# Altium PCB ElectricalConductivityMeter.PcbDoc
Units mm, origin at the board's own origin, x right, y up, seen from the top; angles counter-clockwise.
Board outline 95.04 x 76.23 mm, 2 copper layers (Top Layer, Bottom Layer); 67 components, 46 nets, 217 pads, 16 vias.
Unrouted connection lines stored in the file: 1.
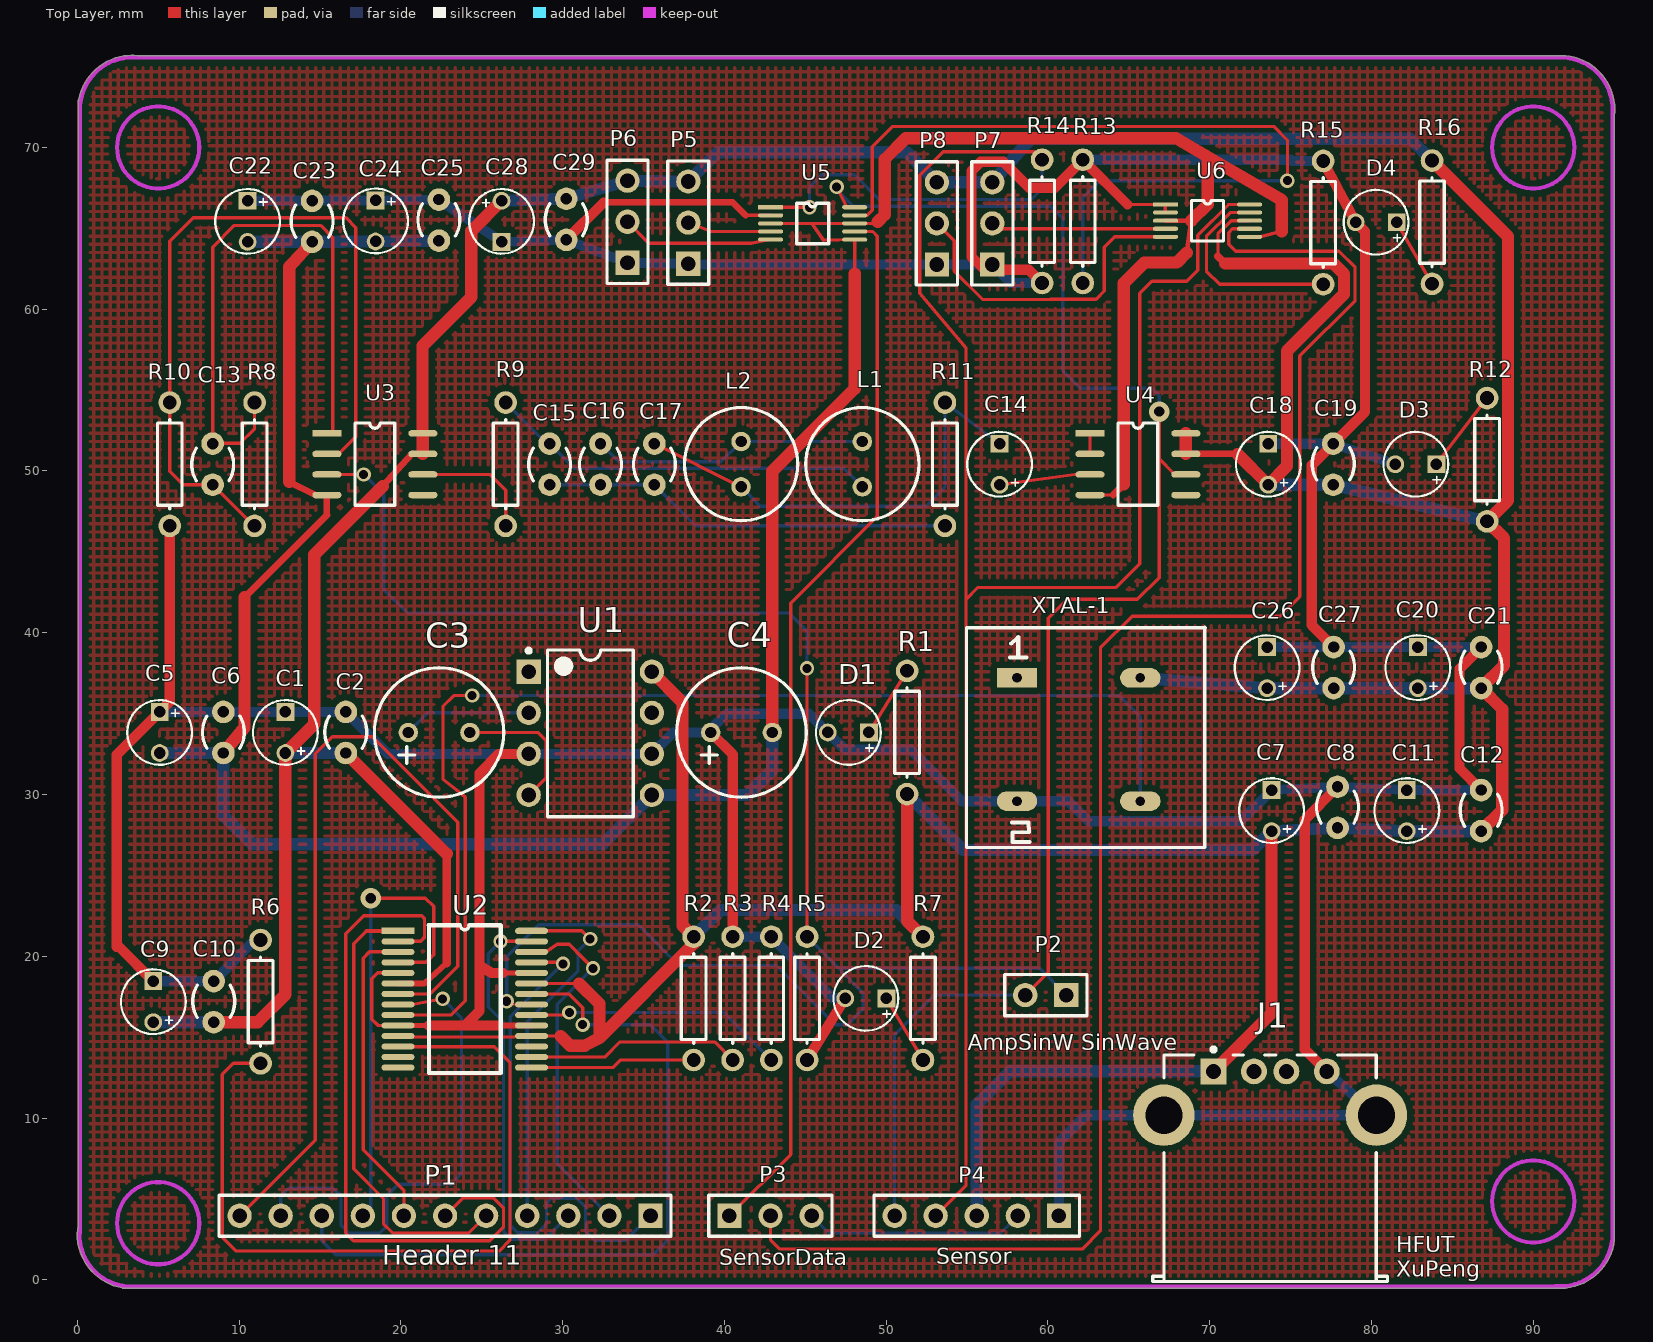
[diagram p0: Top Layer view]
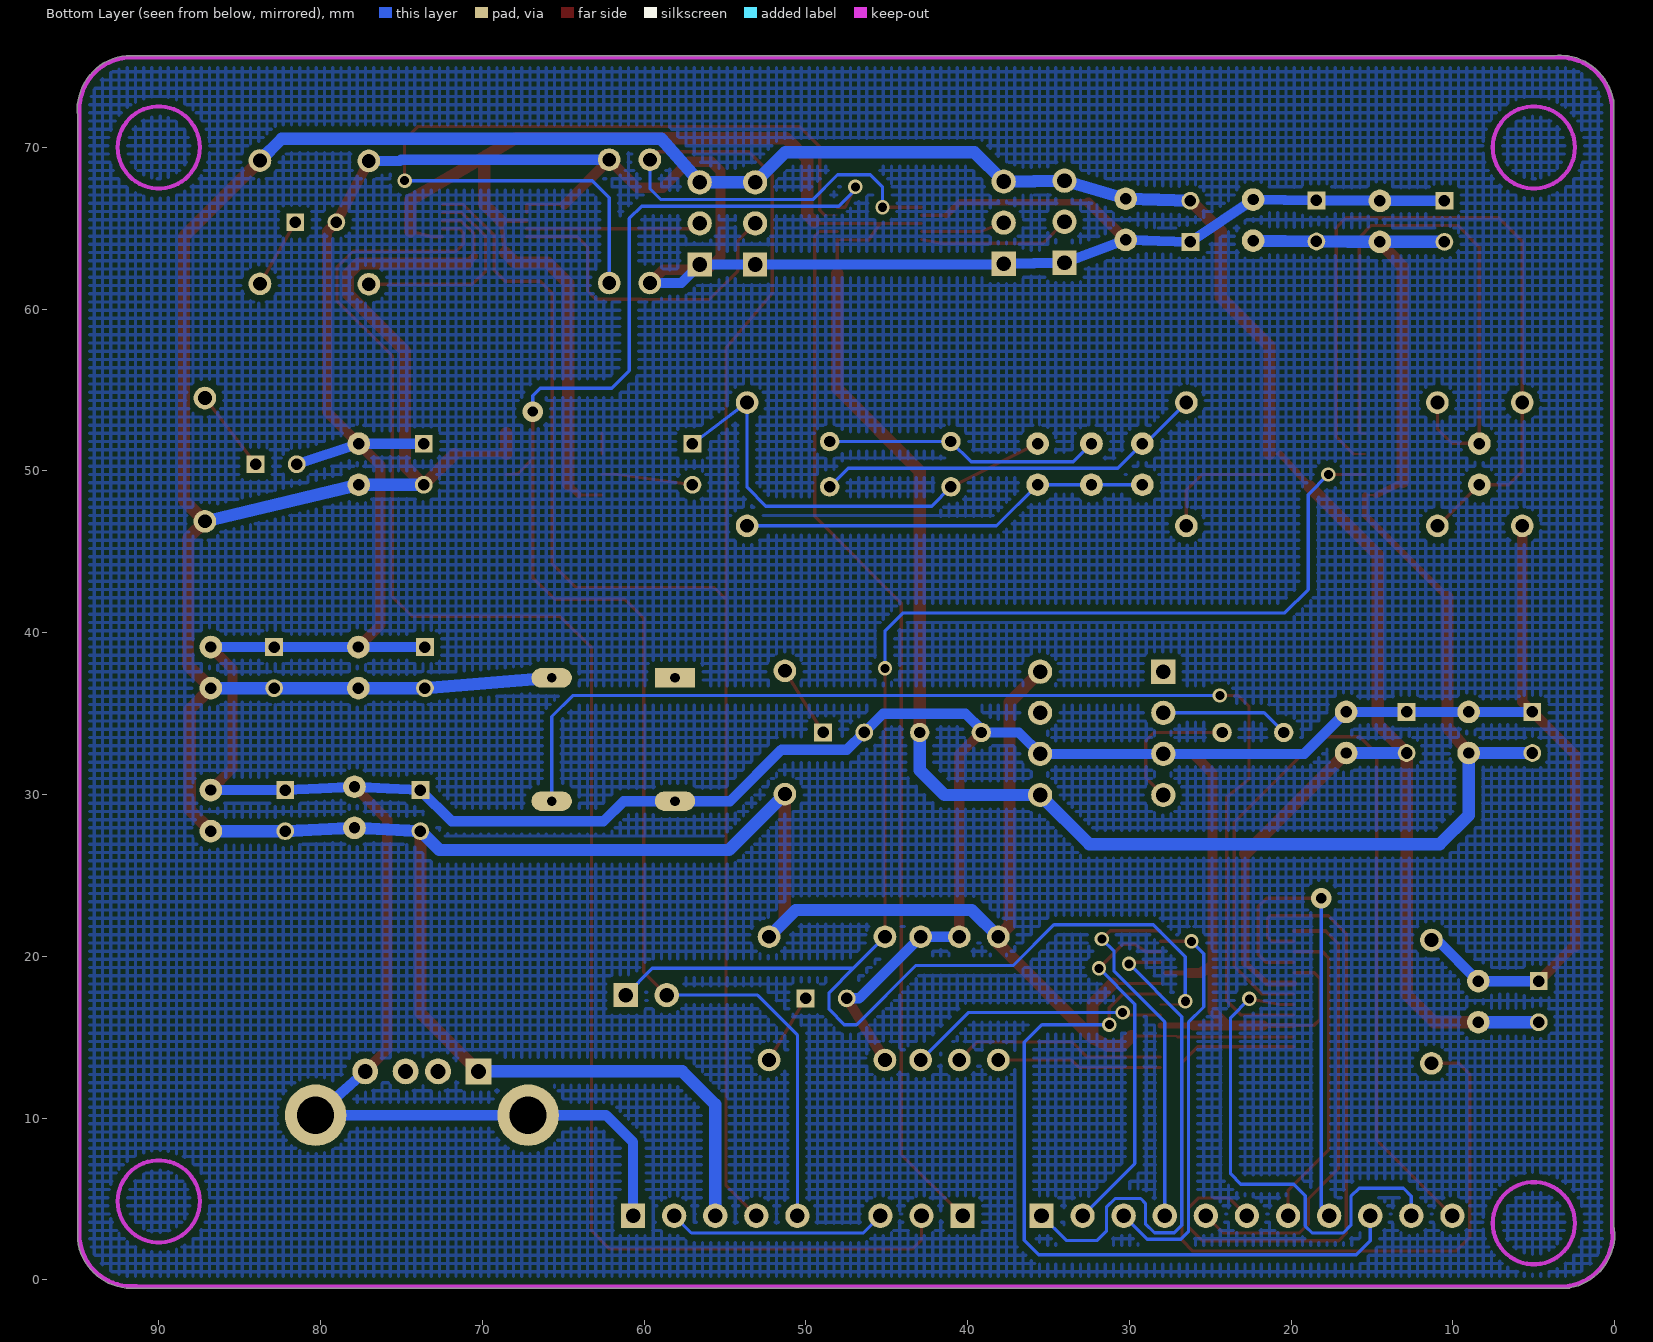
[diagram p1: Bottom Layer view, seen from below]

## Layer stack, top to bottom
Top Solder: solder mask 0.0102, Solder Resist, Dk 3.5
Top Layer: signal copper 0.0356
Dielectric1: dielectric 0.32, FR-4, Dk 4.8
Bottom Layer: signal copper 0.0356
Bottom Solder: solder mask 0.0102, Solder Resist, Dk 3.5

## Board outline
2.78,-0.497 cw(c3.367,2.819) 0.015,3.136 cw(c0.141,3.124) 0.05,3.213 0.05,72.862 cw(c0.178,72.862) 0.096,72.959 cw(c3.404,72.329) 2.897,75.658 cw(c2.972,75.555) 2.972,75.682 3.095,75.682 cw(c3.404,72.329) 3.712,75.682 91.973,75.682 cw(c91.973,75.555) 91.993,75.681 cw(c91.669,72.329) 95.036,72.329 cw(c91.669,72.329) 95.022,72.018 95.022,2.515 cw(c94.894,2.515) 95.016,2.476 cw(c91.669,2.845) 91.431,-0.514 cw(c91.364,-0.406) 91.364,-0.534 2.87,-0.534 cw(c2.87,-0.406)

## Design rules (kind name [scope] priority, off if disabled: settings)
Clearance Clearance_PolyGon [InPolygon] p1: gap=0.381 ignorepadtopadclearanceinfootprint=TRUE
Clearance [All] p2: gap=0.203 ignorepadtopadclearanceinfootprint=TRUE
FabricationTestpoint [(IsPad And (OnTopLayer Or OnBottomLayer))] p1: side=3 testpointundercomponent=TRUE minsize=1.016 maxsize=2.54 preferedsize=1.524 minholesize=0 maxholesize=1.016 preferedholesize=0.813 testpointgrid=0.025 allowsidetop=TRUE allowsidebottom=TRUE usegrid=TRUE gridtolerance=0
HoleSize [All] p1: absolutevalues=TRUE maxlimit=3.048 minlimit=0.025 maxpercent=80.000 minpercent=20.000
MinimumAnnularRing [All] p1: minimumring=0.254
PolygonConnect [All] p1: connectstyle=Relief reliefconductorwidth=0.254 reliefentries=4 polygonreliefangle="90 Angle" airgapwidth=0.254
RoutingPriority RoutingPriority_-5V [InNet('-5V')] p1: routingpriority=20
RoutingPriority RoutingPriority_GND [InNet('GND')] p2: routingpriority=30
RoutingPriority RoutingPriority_+5V [InNet('+5V')] p3: routingpriority=20
RoutingVias [All] p1: holewidth=0.559 width=0.889 viastyle="Through Hole" minholewidth=0.508 minwidth=0.889 maxholewidth=0.711 maxwidth=0.889
RoutingVias RoutingVias_-5V [All] p2: holewidth=0.635 width=1.27 viastyle="Through Hole" minholewidth=0.508 minwidth=1.016 maxholewidth=0.711 maxwidth=1.27
RoutingVias RoutingVias_+5V [InNet('+5V')] p3: holewidth=0.635 width=1.016 viastyle="Through Hole" minholewidth=0.508 minwidth=1.016 maxholewidth=0.711 maxwidth=1.27
SMDNeckDown [All] p1: percent=30.000
SolderMaskExpansion [All] p1: expansion=0.102
Width Width_-5V [InNet('-5V')] p1: maxlimit=1.016 minlimit=0.203 preferedwidth=0.762
Width Width_+5V [InNet('+5V')] p2: maxlimit=1.016 minlimit=0.203 preferedwidth=0.762
Width Width_GND [InNet('GND')] p3: maxlimit=0.762 minlimit=0.203 preferedwidth=0.635
Width [All] p4: maxlimit=0.254 minlimit=0.203 preferedwidth=0.203
27 further rules are at their usual default settings.

## Classes and differential pairs
component class Sensor: C22 C23 C24 C25 C26 C27 C28 C29 D4 P3 P4 P5 P6 P7 P8 R13 R14 R15 R16 U5 U6
component class SinWaveAmplifier: C13 C14 C15 C16 C17 C18 C19 C20 C21 D3 L1 L2 R8 R9 R10 R11 R12 U3 U4
component class SinWaveCreator: C7 C8 C9 C10 C11 C12 D2 P1 P2 R2 R3 R4 R5 R6 R7 U2 XTAL-1
component class Power: C1 C2 C3 C4 C5 C6 D1 J1 R1 U1

## Components (designator, comment, footprint, x,y, rotation, side; value= is the part's Value field where it differs from the comment)
C1 "Cap" RB0.1/0.2 12.865,35.107 r90 top value=10uF
C2 "Cap" C-RAD 16.599,33.837 r270 top value=0.1uF
C3 "Cap Pol" RB0.15/3 20.46,33.837 r0 top value=150uF
C4 "Cap Pol" RB0.15/3 39.154,33.837 r0 top value=150uF
C5 "Cap" Rev-RB0.1/0.2 5.093,35.107 r90 top value=10uF
C6 "Cap" C-RAD 9.03,33.837 r270 top value=0.1uF
C7 "Cap" RB0.1/0.2 73.825,30.277 r90 top value=10uF
C8 "Cap" C-RAD 77.902,29.21 r270 top value=0.1uF
C9 "Cap" RB0.1/0.2 4.699,18.466 r90 top value=10uF
C10 "Cap" C-RAD 8.433,17.196 r270 top value=0.1uF
C11 "Cap" RB0.1/0.2 82.182,30.277 r90 top value=10uF
C12 "Cap" C-RAD 86.779,29.007 r270 top value=0.1uF
C13 "Cap" C-RAD 8.369,50.419 r90 top value=1pF
C14 "Cap" RB0.1/0.2 57.01,51.689 r90 top value=1uF
C15 "Cap" C-RAD 29.197,50.419 r90 top value=2.2nF
C16 "Cap" C-RAD 32.347,50.419 r90 top value=3.3nF
C17 "Cap" C-RAD 35.674,50.419 r90 top value=2.2nF
C18 "Cap" RB0.1/0.2 73.622,51.689 r90 top value=10uF
C19 "Cap" C-RAD 77.635,50.419 r270 top value=0.1uF
C20 "Cap" RB0.1/0.2 82.867,39.116 r90 top value=10uF
C21 "Cap" C-RAD 86.779,37.846 r270 top value=0.1uF
C22 "Cap" Rev-RB0.1/0.2 10.528,66.7 r90 top value=10uF
C23 "Cap" C-RAD 14.516,65.43 r270 top value=0.1uF
C24 "Cap" Rev-RB0.1/0.2 18.44,66.726 r90 top value=10uF
C25 "Cap" C-RAD 22.352,65.507 r270 top value=0.1uF
C26 "Cap" RB0.1/0.2 73.546,39.116 r90 top value=10uF
C27 "Cap" C-RAD 77.66,37.846 r270 top value=0.1uF
C28 "Cap" RB0.1/0.2 26.225,64.16 r270 top value=10uF
C29 "Cap" C-RAD 30.226,65.557 r90 top value=0.1uF
D1 "LED0" RB2.54/4 48.933,33.837 r0 top
D2 "LED0" RB2.54/4 50.013,17.399 r0 top
D3 "LED0" RB2.54/4 84.01,50.419 r0 top
D4 "LED0" RB2.54/4 81.559,65.38 r0 top
J1 "PowerIn+5V" USB_A1 73.736,-0.102 r270 top
L1 "Inductor" PK0608-2.8/7 48.527,49.019 r90 top value=6.8uH
L2 "Inductor" PK0608-2.8/7 41.034,51.819 r270 top value=6.8uH
P1 "Header 11" HDR1X11 35.433,3.962 r180 top
P2 "AmpSinW SinWave" HDR1X2 61.138,17.602 r180 top
P3 "SensorData" HDR1X3 40.31,3.962 r0 top
P4 "Sensor" HDR1X5 60.681,3.962 r180 top
P5 "Header 3" HDR1X3 37.77,62.814 r90 top
P6 "Header 3" HDR1X3 34.011,62.865 r90 top
P7 "Header 3" HDR1X3 56.566,62.763 r90 top
P8 "Header 3" HDR1X3 53.137,62.763 r90 top
R1 "Res1" AXIAL-0.3 51.295,33.837 r270 top value=150
R2 "Res1" AXIAL-0.3 38.1,17.399 r90 top value=1K
R3 "Res1" AXIAL-0.3 40.513,17.399 r90 top value=1K
R4 "Res1" AXIAL-0.3 42.901,17.399 r90 top value=100
R5 "Res1" AXIAL-0.3 45.11,17.399 r90 top value=100
R6 "Res1" AXIAL-0.3 11.328,17.196 r90 top value=3.9K
R7 "Res1" AXIAL-0.3 52.273,17.399 r90 top value=150
R8 "Res1" AXIAL-0.3 10.96,50.419 r90 top value=1K
R9 "Res1" AXIAL-0.3 26.479,50.419 r90 top value=50
R10 "Res1" AXIAL-0.3 5.715,50.419 r90 top value=1K
R11 "Res1" AXIAL-0.3 53.632,50.419 r90 top value=1K
R12 "Res1" AXIAL-0.3 87.147,50.698 r270 top value=150
R13 "Res1" AXIAL-0.3 62.154,65.43 r90 top value=1K
R14 "Res1" AXIAL-0.3 59.639,65.43 r90 top value=10K
R15 "Res1" AXIAL-0.3 77.013,65.354 r90 top value=1K
R16 "Res1" AXIAL-0.3 83.744,65.38 r90 top value=150
U1 "MAX660" DIP-8 31.712,33.782 r0 top
U2 "AD9850" SSOP28 23.952,17.348 r0 top
U3 "ADA4817" SOP8 15.43,52.324 r0 top
U4 "ADA4817" SOP8 62.598,52.324 r0 top
U5 "AD8250" MSOP10 42.857,66.303 r0 top
U6 "AD8250" MSOP10 67.266,66.473 r0 top
XTAL-1 "XTAL-125M-7.62" XTAL-0.3*4 58.09,37.211 r0 top locked

## Footprints (in the part's own frame and the unit in brackets; to place one, negate y for a bottom-side part, rotate by r counter-clockwise, add the part's x,y. Pads: shape width x height; smd on the part's side, far side on the other; paste and mask are expansions set on the pad)
AXIAL-0.3 [mm] "Axial Device, Thru-Hole; 2 Leads; 0.3 in Pin Spacing"
  round 1.4 hole 0.85: 1(-3.81,0) 2(3.81,0)
  silkscreen extent -2.77,-0.76 2.77,0.76
C-RAD [mm] "瓷片电容"
  round 1.4 hole 0.7: 1(-1.27,0) 2(1.27,0)
  silkscreen extent -1.02,-1.3 0.98,1.3
DIP-8 [mm] "DIP; 8 Leads; Row Spacing 7.62 mm; Pitch 2.54 mm"
  rect 1.5x1.5 hole 0.9: 1(-3.81,3.81)
  round 1.5 hole 0.9: 2(-3.81,1.27) 3(-3.81,-1.27) 4(-3.81,-3.81) 5(3.81,-3.81) 6(3.81,-1.27) 7(3.81,1.27) 8(3.81,3.81)
  silkscreen extent -3.93,-5.15 2.65,5.23, body extent -3.6,-5.15 3.6,5.15, height 5.08
HDR1X2 [mm] "Connector; Header; 2 Position"
  rect 1.5x1.5 hole 0.9: 1(0,0)
  round 1.5 hole 0.9: 2(2.54,0)
  silkscreen extent -1.27,-1.27 3.81,1.27
HDR1X3 [mm] "Connector; Header; 3 Position"
  rect 1.5x1.5 hole 0.9: 1(0,0)
  round 1.5 hole 0.9: 2(2.54,0) 3(5.08,0)
  silkscreen extent -1.27,-1.27 6.35,1.27
HDR1X5 [mm] "Connector; Header; 5 Position"
  rect 1.5x1.5 hole 0.9: 1(0,0)
  round 1.5 hole 0.9: 2(2.54,0) 3(5.08,0) 4(7.62,0) 5(10.16,0)
  silkscreen extent -1.27,-1.27 11.43,1.27
HDR1X11 [mm] "Connector; Header; 11 Position"
  rect 1.5x1.5 hole 0.9: 1(0,0)
  round 1.5 hole 0.9: 2(2.54,0) 3(5.08,0) 4(7.62,0) 5(10.16,0) 6(12.7,0) 7(15.24,0) 8(17.78,0) 9(20.32,0) 10(22.86,0) 11(25.4,0)
  silkscreen extent -1.27,-1.27 26.67,1.27
MSOP10 [mm] "脚距0.5mm"
  rect 1.55x0.25 smd: 1(0,0)
  oval 1.55x0.25 smd: 2(0,-0.5) 3(0,-1) 4(0,-1.5) 5(0,-2) 6(5.2,-2) 7(5.2,-1.5) 8(5.2,-1) 9(5.2,-0.5) 10(5.2,0)
  silkscreen extent 1.61,-2.25 3.59,0.25
PK0608-2.8/7 [mm]
  round 1.2 hole 0.7: 1(0,0) 2(2.8,0)
  silkscreen extent -2.1,-3.5 4.9,3.5
RB0.1/0.2 [mm]
  rect 1.1x1.1 hole 0.711: 1(0,0)
  round 1.1 hole 0.711: 2(-2.54,0)
  silkscreen extent -3.27,-2 0.73,2
RB0.15/3 [mm]
  round 1.2 hole 0.7: 1(0,0) 2(3.81,0)
  silkscreen extent -2.09,-4 5.9,4
RB2.54/4 [mm]
  rect 1.1x1.1 hole 0.711: 1(0,0)
  round 1.1 hole 0.711: 2(-2.54,0)
  silkscreen extent -3.27,-2 0.73,2
Rev-RB0.1/0.2 [mm] "正负极颠倒的RB0.1/0.2"
  rect 1.1x1.1 hole 0.711: 1(0,0)
  round 1.1 hole 0.711: 2(-2.54,0)
  silkscreen extent -3.27,-2 0.73,2
SOP8 [mm] "脚距1.27mm"
  rect 1.8x0.4 smd: 1(0,0)
  oval 1.8x0.4 smd: 2(0,-1.27) 3(0,-2.54) 4(0,-3.81) 5(5.93,-3.81) 6(5.93,-2.54) 7(5.93,-1.27) 8(5.93,0)
  silkscreen extent 1.73,-4.44 4.2,0.64
SSOP28 [mil] "脚距0.65mm"
  rect 80x15 smd: 1(-162.5,166.4)
  oval 80x15 smd: 2(-162.5,140.8) 3(-162.5,115.2) 4(-162.5,89.6) 5(-162.5,64) 6(-162.5,38.4) 7(-162.5,12.8) 8(-162.5,-12.8) 9(-162.5,-38.4) 10(-162.5,-64) 11(-162.5,-89.6) 12(-162.5,-115.2) 13(-162.5,-140.8) 14(-162.5,-166.4) 15(162.5,-166.4) 16(162.5,-140.8) 17(162.5,-115.2) 18(162.5,-89.6) 19(162.5,-64) 20(162.5,-38.4) 21(162.5,-12.8) 22(162.5,12.8) 23(162.5,38.4) 24(162.5,64) 25(162.5,89.6) 26(162.5,115.2) 27(162.5,140.8) 28(162.5,166.4)
  silkscreen extent -88,-179 88,180
USB_A1 [mm]
  rect 1.6x1.6 hole 0.92: 1(-12.99,-3.5)
  round 1.6 hole 0.92: 2(-12.99,-1) 3(-12.99,1) 4(-12.99,3.5)
  round 3.8 hole 2.3: 5(-10.28,6.57) 6(-10.28,-6.57)
  silkscreen extent -14.46,-7.25 0,7.25
XTAL-0.3*4 [mm] "125Mhz有源晶振，正方形四脚"
  rect 2.5x1.2 hole 0.6: 1(0,0)
  oval 2.5x1.2 hole 0.6: 2(0,-7.62) 3(7.62,-7.62) 4(7.62,0)
  silkscreen extent -3.12,-10.49 11.66,3.15

## Part data
C1 C2 C5 C6 C7 C8 C9 C10 C11 C12 C13 C14 C15 C16 C17 C18 C19 C20 C21 C22 C23 C24 C25 C26 C27 C28 C29: "无极性电容", LatestRevisionDate=17-Jul-2002, LatestRevisionNote="Re-released for DXP Platform.", PackageReference=RAD-0.3, Published=8-Jun-2000, Publisher="Altium Limited"
C3 C4: "极性电解电容", LatestRevisionDate=17-Jul-2002, LatestRevisionNote="Re-released for DXP Platform.", PackageReference=RB7.6-15, Published=8-Jun-2000, Publisher="Altium Limited", Vol=16V
D1 D2 D3 D4: "Typical INFRARED GaAs LED", LatestRevisionDate=08-Jul-2005, LatestRevisionNote="Mech Layer 1 removed.", PackageDescription="LED; 2 Leads", PackageReference=LED-0, Published=8-Jun-2000, Publisher="Altium Limited"
J1: library part USB, "USB接口"
P1: "Header, 11-Pin", LatestRevisionDate=17-Jul-2002, LatestRevisionNote="Re-released for DXP Platform.", Publisher="Altium Limited"
P2: library part "Header 2", "Header, 2-Pin", LatestRevisionDate=17-Jul-2002, LatestRevisionNote="Re-released for DXP Platform.", Publisher="Altium Limited"
P3: library part "Header 3", "Header, 3-Pin", LatestRevisionDate=17-Jul-2002, LatestRevisionNote="Re-released for DXP Platform.", Publisher="Altium Limited"
P4: library part "Header 5", "Header, 5-Pin", LatestRevisionDate=17-Jul-2002, LatestRevisionNote="Re-released for DXP Platform.", Publisher="Altium Limited"
P5 P6 P7 P8: "Header, 3-Pin", LatestRevisionDate=17-Jul-2002, LatestRevisionNote="Re-released for DXP Platform.", Publisher="Altium Limited"
R1 R2 R3 R4 R5 R6 R7 R8 R9 R10 R11 R12 R13 R14 R15 R16: "Resistor", LatestRevisionDate=17-Jul-2002, LatestRevisionNote="Re-released for DXP Platform.", PackageDescription="Axial Device, Thru-Hole; 2 Leads; 0.3 in Pin Spacing", PackageReference=AXIAL-0.3, Published=8-Jun-2000, Publisher="Altium Limited"
U1: library part MAX660CSA, "-5V电源芯片", Code_IPC=SOIC127P600-8, Code_JEDEC=MS-012-AA, ComponentLink1Description="Manufacturer Link", ComponentLink1URL=http://www.maxim-ic.com/, ComponentLink2Description=Datasheet, ComponentLink2URL=http://pdfserv.maxim-ic.com/en/ds/MAX660.pdf, DatasheetVersion=Sep-1996, LatestRevisionDate=13-Apr-2006, LatestRevisionNote="IPC-7351 Footprint Added.", PackageDescription="8-Pin Small Outline Integrated Circuit 1.27 mm Pitch", PackageReference=NSO8, Published=16-Jan-2001, Publisher="Altium Limited"
L1 L2: Code_IEC=1005, Code_JEITA=0402, LatestRevisionDate=29-May-2009, LatestRevisionNote="IPC-7351 Footprint Added.", PackageDescription="Chip Inductor", PackageReference=0402-A, Published=8-Jun-2000, Publisher="Altium Limited"

## Via types
v1: diameter 0.889, hole 0.559, Top Layer to Bottom Layer, 14 vias
v2: diameter 1.27, hole 0.635, Top Layer to Bottom Layer, 2 vias

## Nets (pads, with @x,y where several pads share a name; then routed paths per layer and width w, separated by ;. In a path a pad name is that pad's centre, name@x,y a point inside that pad or via, vN(x,y) a via of type N, cw(c..) or ccw(c..) an arc to the next point about the centre after c; other vN are vias at no path point)
+5V: C1.2 C2.2 C7.2 C8.2 C9.2 C10.2 C11.2 C12.2 C18.2 C19.2 C20.2 C21.2 C26.2 C27.2 C28.2 C29.2 J1.1 P4.3 P5.3 P6.3 P7.3 P8.3 R1.2 R2.2 R7.2 R12.2 R16.2 U1.8 U2.6 U2.11 U2.18 U2.23 U3.7 U3.8 U4.7 U4.8 U6.8 XTAL-1.4 | length 409.3
  Top Layer w0.114: U2.11 U2.11@19.886,15.011 ; 27.026,15.011 27.087,15.072 U2.18
  Top Layer w0.12: U3.7@20.701,51.054 U3.7
  Top Layer w0.204: U2.18 29.874,15.072 ; U2.23 31.018,18.324 ; 70.51,63.271 70.51,64.651 71.332,65.473 U6.8
  Top Layer w0.214: U2.11@19.886,15.011 27.026,15.011
  Top Layer w0.362: U2.6 21.463,18.324 22.835,19.563
  Top Layer w0.4: 18.872,49.047 U3.7@20.701,51.054 ; U4.7 71.717,51.054
  Top Layer w0.462: 70.51,63.271 70.953,62.828
  Top Layer w0.514: 22.835,19.563 22.835,26.331
  Top Layer w0.74: 32.272,14.949 32.272,17.07
  Top Layer w0.762: C10.2 11.151,15.926 12.865,17.64 C1.2 14.656,34.358 14.656,44.831 18.872,49.047 ; C2.2 22.835,26.331 ; U3.7 21.36,52.3 21.336,52.324 21.336,57.734 24.359,60.757 24.359,64.834 C28.2 ; 29.874,15.072 30.468,14.478 31.369,14.478 32.272,14.949 38.1,20.777 R2.2 37.414,21.895 37.414,35.7 U1.8 ; 31.018,18.324 32.272,17.07 ; R1.2 51.295,22.187 R7.2 ; U4.7 U4.8 ; J1.1 73.825,16.477 C7.2 ; 70.953,62.828 77.648,62.828 78.297,62.179 78.297,60.935 74.778,57.415 74.778,50.305 C18.2 71.717,51.054 ; R16.2 88.443,64.491 88.443,48.184 R12.2 88.189,45.847 88.189,37.986 C21.2 88.087,35.268 88.087,29.045 C12.2
  Bottom Layer w0.762: C9.2 C10.2 ; C1.2 C2.2 ; C28.2 28.206,66.763 C29.2 P6.3 35.89,67.92 P5.3 39.573,69.698 51.283,69.698 P8.3 P7.3 58.928,70.536 82.398,70.536 R16.2 ; R2.2 39.751,22.86 50.622,22.86 R7.2 ; R1.2 54.754,26.568 72.657,26.568 C7.2 75.843,27.837 C8.2 80.035,27.839 C11.2 C12.2 ; P4.3 55.601,10.846 57.643,12.888 J1.1 ; XTAL-1.4 C26.2 C27.2 C20.2 C21.2 ; C18.2 C19.2 R12.2
-5V: C4.2 C5.2 C6.2 C22.2 C23.2 C24.2 C25.2 U1.5 U3.4 U4.4 U5.3 U5.6 U5.8 U6.3 U6.6 | length 198.9
  Top Layer w0.12: U3.4@14.732,48.514 U3.4@15.418,48.514
  Top Layer w0.203: 45.415,65.303 46.126,64.262 U5.6 48.057,62.205
  Top Layer w0.204: U5.3 45.415,65.303 U5.8 49.378,65.303 ; U4.4 64.033,48.514 ; U6.6 73.127,64.473 74.447,64.821
  Top Layer w0.262: U6.3 68.859,65.473
  Top Layer w0.3: 68.58,63.5 68.859,65.473
  Top Layer w0.4: 13.106,49.327 U3.4@14.732,48.514
  Top Layer w0.404: 15.43,47.282 U3.4
  Top Layer w0.42: 10.338,42.189 15.43,47.282 ; 64.033,48.514 64.694,49.174
  Top Layer w0.762: C6.2 10.338,34.138 10.338,42.189 ; 13.106,49.327 13.106,62.611 13.919,63.504 C23.2 ; C4.2 42.964,50 48.057,55.093 48.057,62.205 ; 49.485,65.411 49.911,65.837 49.911,69.266 51.206,70.561 67.92,70.561 69.75,69.493 ; 64.694,49.174 64.694,61.62 65.964,62.89 67.97,62.89 68.58,63.5 ; 68.859,65.473 69.875,66.476 69.875,69.367 69.75,69.493 ; 74.447,64.821 74.447,66.751 69.75,69.493
  Bottom Layer w0.762: C5.2 C6.2 9.03,28.715 10.82,26.924 32.474,26.924 U1.5 41.427,29.972 42.964,31.509 C4.2 ; C22.2 C23.2 16.472,64.173 C24.2 20.396,64.211 C25.2
AD9850BUS0: P1.1 U2.25 | length 32.6
  Top Layer w0.114: v1@29.931,19.624 v1(30.023,19.533)
  Top Layer w0.204: U2.25 v1@29.931,19.624
  Bottom Layer w0.203: v1(30.023,19.533) 26.758,16.268 26.758,3.378 27.229,2.908 28.448,2.908 29.007,3.466 29.007,4.724 29.312,5.029 30.886,5.029 31.42,4.496 31.42,2.997 31.979,2.438 33.909,2.438 P1.1
AD9850BUS1: P1.2 U2.26 | length 23.6
  Top Layer w0.203: 30.856,20.274 v1(31.877,19.253)
  Top Layer w0.214: U2.26 28.956,20.274 29.693,20.752 30.404,20.752 v1(31.877,19.253)
  Bottom Layer w0.203: v1(31.877,19.253) 29.667,17.043 29.667,7.188 P1.2
AD9850BUS2: P1.3 U2.27 | length 25.4
  Top Layer w0.203: v1(26.162,20.925) U2.27
  Bottom Layer w0.203: v1(26.162,20.925) 25.4,20.163 25.4,16.866 26.352,15.914 26.352,2.972 26.822,2.501 28.892,2.501 P1.3
AD9850BUS3: P1.4 U2.28 | length 22.5
  Top Layer w0.203: 31.191,21.575 v1(31.699,21.067)
  Top Layer w0.214: U2.28 31.191,21.575
  Bottom Layer w0.203: P1.4 27.813,15.944 30.948,19.079 30.948,20.316 v1(31.699,21.067)
AD9850BUS4: P1.5 U2.1 | length 28.2
  Top Layer w0.203: 17.094,20.787 17.094,6.858 18.923,5.029 18.923,3.48 19.507,2.896 24.206,2.896 P1.5
  Top Layer w0.214: 17.094,20.787 17.882,21.575
  Top Layer w0.24: 17.882,21.575 U2.1
AD9850BUS5: P1.6 U2.2 | length 42.6
  Top Layer w0.203: 16.586,21.387 16.586,2.896 17.069,2.413 25.502,2.413 26.34,3.251 26.34,4.47 25.756,5.055 23.825,5.055 P1.6
  Top Layer w0.214: 16.586,21.387 17.704,22.504 21.285,22.504 21.463,22.327 21.463,21.168 21.219,20.925 U2.2
AD9850BUS6: P1.7 U2.3 | length 19.3
  Top Layer w0.203: 17.678,8.052 20.193,5.537 P1.7
  Top Layer w0.214: 17.678,8.052 17.678,19.888 18.064,20.274 U2.3
AD9850BUS7: P1.8 U2.4 | length 29.3
  Top Layer w0.203: v2(18.136,23.597) 21.514,23.597 22.022,23.089
  Top Layer w0.214: U2.4 21.554,19.624 22.022,20.091 22.022,23.089
  Bottom Layer w0.203: P1.8 18.136,4.445 v2(18.136,23.597)
AD9850BUS8: P1.9 U2.22 | length 46.2
  Top Layer w0.203: 30.383,17.673 31.242,16.815 v1(31.242,15.773)
  Top Layer w0.204: U2.22 30.383,17.673
  Bottom Layer w0.203: P1.9 15.113,2.413 15.977,1.549 35.611,1.549 36.5,2.438 36.5,14.681 35.408,15.773 v1(31.242,15.773)
AD9850BUS9: P1.10 U2.8 | length 31.5
  Top Layer w0.203: U2.8 20.726,17.023 v1(22.581,17.374)
  Bottom Layer w0.203: P1.10 12.573,5.182 13.056,5.664 15.799,5.664 16.307,5.156 16.307,3.378 16.789,2.896 18.694,2.896 19.126,3.327 19.126,5.207 19.837,5.918 23.114,5.918 23.749,6.553 23.749,16.205 v1(22.581,17.374)
AD9850BUS10: P1.11 U2.7 | length 55.2
  Top Layer w0.203: P1.11 14.707,8.636 14.707,32.512 15.773,33.579 18.237,33.579 23.52,28.296 23.52,19.38 21.814,17.673 U2.7
AmpSinWave: P4.5 U4.6 U5.10 | length 98.1
  Top Layer w0.203: v1(46.939,67.564) 47.574,66.296 U5.10 ; 58.598,17.602 60.02,19.025 60.02,40.894 61.189,42.062 65.532,42.062 66.878,43.409 66.878,49.784 ; 66.878,50.749 67.793,49.835 U4.6
  Top Layer w0.204: 66.878,49.784 66.878,50.749 v2(66.878,53.67)
  Bottom Layer w0.203: v1(46.939,67.564) 46.939,67.386 47.955,66.37 60.147,66.37 60.909,65.608 60.909,56.21 62.001,55.118 66.421,55.118 66.878,54.661 v2(66.878,53.67) ; P4.5 50.521,15.138 52.984,17.602 58.598,17.602
GND: C1.1 C2.1 C4.1 C5.1 C6.1 C7.1 C8.1 C9.1 C10.1 C11.1 C12.1 C18.1 C19.1 C20.1 C21.1 C22.1 C23.1 C24.1 C25.1 C26.1 C27.1 C28.1 C29.1 D1.2 D2.2 D3.2 D4.2 J1.4 J1.5 J1.6 P4.1 P5.1 P6.1 P7.1 P8.1 R3.2 R4.2 R5.1 R6.2 R10.1 R13.2 R14.1 R15.2 U1.3 U1.6 U2.5 U2.10 U2.19 U2.24 U5.2 U6.1 U6.2 XTAL-1.2 | length 405.4
  Top Layer w0.075: U6.2@67.259,65.973 U6.2 ; U6.1@67.259,66.473 U6.1
  Top Layer w0.204: 41.308,65.803 U5.2 ; 64.921,66.473 67.259,66.473 U6.2@67.259,65.973
  Top Layer w0.214: U2.10 18.593,15.723 18.212,16.104 18.212,18.618 18.567,18.974 U2.5
  Top Layer w0.314: U2.10 21.717,15.723 ; 26.314,18.974 U2.24@27.762,18.974
  Top Layer w0.35: 26.035,15.723 U2.19
  Top Layer w0.404: 32.537,66.599 40.513,66.599 41.308,65.803
  Top Layer w0.635: 2.447,20.574 2.447,32.461 5.715,35.729 R10.1 ; 2.591,20.574 C9.1 ; 21.717,15.723 23.952,15.723 ; 26.035,15.723 23.952,15.723 ; 26.314,18.974 25.603,18.974 24.867,19.431 ; U1.3 26.06,32.512 24.867,31.318 24.867,19.431 ; C29.1 32.537,66.599 ; C4.1 40.513,32.478 R3.2 ; R5.1 D2.2 ; R14.1 58.826,62.433 56.083,62.433 55.27,63.246 55.27,68.529 55.855,69.114 57.251,69.114 58.852,67.513 60.427,67.513 R13.2 64.921,66.473 ; R15.2 D4.2 79.605,64.794 79.605,53.659 C19.1 76.302,50.356 76.302,40.475 C27.1 ; J1.4 75.87,14.255 75.87,28.448 C8.1 ; C12.1 85.446,31.61 85.446,37.783 C21.1 ; 23.952,15.723 24.867,16.637 24.867,19.431
  Bottom Layer w0.635: C9.1 C10.1 10.973,21.006 R6.2 ; C5.1 C6.1 C2.1 19.194,32.512 U1.3 U1.6 36.847,33.837 C4.1 ; C22.1 C23.1 16.472,66.713 C24.1 20.396,66.751 C25.1 C28.1 28.206,64.223 C29.1 P6.1 35.89,62.84 P5.1 37.821,62.763 P8.1 P7.1 57.709,61.62 R14.1 ; C4.1@39.154,34.023 40.132,35.001 45.229,35.001 D1.2 47.464,32.766 51.511,32.766 54.686,29.591 XTAL-1.2 61.265,29.591 62.509,28.346 71.895,28.346 C7.1 75.843,30.377 C8.1 80.035,30.379 C11.1 C12.1 ; R3.2 R4.2 46.711,17.399 D2.2 ; P4.1 60.681,8.509 62.35,10.178 J1.5 78.744,11.557 J1.4 ; R13.2 75.006,69.24 75.082,69.164 R15.2 ; C26.1 C27.1 C20.1 C21.1 ; C18.1 C19.1 D3.2
NetC3_1: C3.1 U1.2 | length 7.9
  Bottom Layer w0.203: C3.1 21.675,35.052 U1.2
NetC3_2: C3.2 U1.4 | length 8.7
  Top Layer w0.203: C3.2 28.469,33.837 28.981,33.325 28.981,31.052 U1.4
NetC13_1: C13.1 R8.1 R10.2 U3.2 | length 48.4
  Top Layer w0.12: U3.2 U3.2@16.154,51.054
  Top Layer w0.203: R8.1@10.909,46.609 C13.1 6.553,49.149 5.715,49.987 R10.2 5.715,64.211 7.163,65.659 16.612,65.659 17.221,65.049
  Top Layer w0.204: U3.2@16.154,51.054 17.221,52.121 17.221,65.049
  Bottom Layer w0.203: R8.1@10.909,46.609 R8.1
NetC13_2: C13.2 R8.2 U3.1 | length 37.5
  Top Layer w0.12: U3.1@15.418,52.324 U3.1 15.748,52.324 U3.1@15.799,52.375
  Top Layer w0.203: C13.2 8.369,63.843 9.703,65.176 15.037,65.176 15.799,64.414 ; C13.2@8.395,51.714 10.058,51.714 10.96,52.616 R8.2
  Top Layer w0.204: U3.1@15.799,52.375 15.799,64.414
  Bottom Layer w0.203: R8.2@10.909,54.229 R8.2
NetC14_1: C14.1 C17.2 L2.2 R11.2 | length 29
  Top Layer w0.203: C17.2 L2.2
  Bottom Layer w0.203: L2.2 42.224,47.828 52.476,47.828 53.632,48.984 R11.2 C14.1
NetC14_2: C14.2 U4.3 | length 5.6
  Top Layer w0.203: C14.2 61.874,49.809 U4.3
NetC15_1: C15.1 C16.1 C17.1 R11.1 | length 25.5
  Bottom Layer w0.203: C15.1 C16.1 C17.1 38.214,46.609 R11.1
NetC15_2: C15.2 L1.1 R9.2 | length 24.2
  Bottom Layer w0.203: R9.2 29.019,51.689 C15.2 30.721,50.165 47.381,50.165 L1.1
NetC16_2: C16.2 L1.2 L2.1 | length 17.2
  Bottom Layer w0.203: C16.2 33.464,50.571 39.786,50.571 L2.1 L1.2
NetD1_1: D1.1 R1.1 | length 4.5
  Top Layer w0.203: D1.1 R1.1
NetD2_1: D2.1 R7.1 | length 4.4
  Top Layer w0.203: D2.1 R7.1
NetD3_1: D3.1 R12.1 | length 5.2
  Top Layer w0.203: D3.1 R12.1
NetD4_1: D4.1 R16.1 | length 4.4
  Top Layer w0.204: D4.1 R16.1
NetP3_1: P3.1 U5.7 | length 65.9
  Top Layer w0.203: P3.1 44.094,7.747 44.094,41.834 49.454,47.193
  Top Layer w0.204: U5.7 49.166,64.803 49.454,64.516 49.454,47.193
NetP3_2: P3.2 U6.7 | length 104.5
  Top Layer w0.203: P3.2 42.85,2.489 43.434,1.905 62.128,1.905 63.246,3.023 63.246,39.065 65.202,41.021 74.346,41.021 75.565,42.24 75.565,57.11 78.983,60.528 78.983,62.586 77.992,63.576
  Top Layer w0.204: U6.7 71.408,64.973 71.171,64.736 71.171,64.008 71.603,63.576 77.992,63.576
NetP4_4: P4.4 R14.2 U5.1 U6.10 | length 134.3
  Top Layer w0.203: P4.4 54.94,5.842 54.94,42.062 ; R14.2 59.143,69.736 53.531,69.736 52.07,68.275 52.07,60.985 54.94,57.582 54.94,42.062 ; 69.266,64.558 69.266,62.408 68.58,61.722 66.43,61.722 65.684,60.976 65.684,44.272 64.211,42.799 55.677,42.799 54.94,42.062 ; 69.392,64.685 71.088,66.38 ; 71.181,66.473 71.274,66.473
  Top Layer w0.204: U5.1 v1(45.263,66.303) ; 69.266,64.558 69.392,64.685 ; 71.088,66.38 71.181,66.473 ; 71.274,66.473 U6.10
  Bottom Layer w0.203: v1(45.263,66.303) 45.263,67.564 46.012,68.313 48.044,68.313 49.581,66.777 58.953,66.777 59.639,67.462 R14.2
NetP5_2: P5.2 U5.4 | length 5.2
  Top Layer w0.203: P5.2 39.192,64.803
  Top Layer w0.204: 39.192,64.803 U5.4
NetP6_2: P6.2 U5.5 | length 9.4
  Top Layer w0.203: P6.2 35.331,64.084
  Top Layer w0.204: 35.331,64.084 41.656,64.084 U5.5
NetP7_2: P7.2 U6.4 | length 10.8
  Top Layer w0.203: P7.2 56.896,64.973 62.23,64.973
  Top Layer w0.204: 62.23,64.973 U6.4
NetP8_2: P8.2 U6.5 | length 20.4
  Top Layer w0.203: P8.2 54.204,64.237 54.204,62.357 55.956,60.604 60.147,60.604 60.158,60.616 62.978,60.616 63.487,61.125 63.487,63.843 64.118,64.473 U6.5@66.835,64.473
  Top Layer w0.204: U6.5@66.835,64.473 U6.5
NetR2_1: R2.1 U2.15 | length 10.2
  Top Layer w0.203: U2.15 33.096,13.122 33.564,13.589 R2.1
NetR3_1: R3.1 U2.16 | length 13.3
  Top Layer w0.203: 32.614,13.772 33.548,14.707 39.395,14.707 R3.1
  Top Layer w0.204: U2.16 32.614,13.772
NetR4_1: R4.1 U2.20 | length 16.1
  Top Layer w0.203: v1@30.267,16.373 v1(30.416,16.523)
  Top Layer w0.204: U2.20 v1@30.267,16.373
  Bottom Layer w0.203: v1(30.416,16.523) 39.967,16.523 R4.1
NetR6_1: R6.1 U2.12 | length 49.5
  Top Layer w0.203: R6.1 9.652,13.386 8.966,12.7 8.966,2.642 9.83,1.778 26.086,1.778 26.746,2.438 26.746,13.462 25.786,14.422
  Top Layer w0.214: U2.12 25.786,14.422
NetR9_1: R9.1 U3.6 | length 7.7
  Top Layer w0.203: 25.502,49.784 26.479,48.806 R9.1
  Top Layer w0.204: U3.6 25.502,49.784
NetR13_1: R13.1 U5.9 | length 52.6
  Top Layer w0.075: U5.9 48.836,65.803
  Top Layer w0.203: 49.137,70.041 50.394,71.298 73.965,71.298 74.803,70.46 v1(74.803,67.945)
  Top Layer w0.204: 48.836,65.803 49.137,66.104 49.137,70.041
  Bottom Layer w0.203: R13.1 62.154,66.904 63.195,67.945 v1(74.803,67.945)
NetR15_1: R15.1 U6.9 | length 13
  Top Layer w0.203: 69.799,62.357 70.612,61.544 R15.1
  Top Layer w0.204: 69.799,62.357 69.799,64.423 69.8,64.516 71.256,65.973 U6.9
NetU4_1: U4.1 U4.2 | length 1.3
  Top Layer w0.204: U4.2 U4.1
SinWave: P2.1 R5.2 U2.21 U3.3 | length 106.9
  Top Layer w0.114: v1(26.543,17.221) 26.741,17.023 U2.21
  Top Layer w0.203: R5.2 v1(45.11,37.795)
  Top Layer w0.204: U3.3 v1(17.704,49.784)
  Bottom Layer w0.203: v1(17.704,49.784) 18.948,48.539 18.948,42.672 20.396,41.224 43.993,41.224 45.11,40.107 v1(45.11,37.795) ; v1(26.543,17.221) 26.543,19.964 28.524,21.946 34.662,21.946 37.176,19.431 43.205,19.431 46.863,15.773 47.625,15.773 48.565,16.713 48.565,17.755 47.066,19.253 ; R5.2 47.066,19.253 ; P2.1 59.487,19.253 47.066,19.253
TmptDt: P3.3 P4.2 | length 13.6
  Bottom Layer w0.203: P3.3 46.457,2.896 57.074,2.896 P4.2
XTAL125M: U2.9 XTAL-1.3 | length 72.5
  Top Layer w0.203: 23.104,16.373 23.978,17.247 23.978,29.846 23.419,30.291 22.606,30.937 22.606,35.458 23.266,36.119 v1(24.409,36.119)
  Top Layer w0.214: U2.9 23.104,16.373
  Bottom Layer w0.203: v1(24.409,36.119) 64.414,36.119 65.71,34.823 XTAL-1.3
pads on no net: J1.2 J1.3 P2.2 U1.1 U1.7 U2.13 U2.14 U2.17 U3.5 U4.5 XTAL-1.1

## Polygon pours and split planes (outlines as drawn)
no net on Top Layer "AutoNaming" (hatched 90Degree grid 0.508 track 0.203, remove dead copper, pour order 3): 91.973,75.555 92.72,75.555 93.116,75.159 93.421,75.159 94.056,74.524 94.056,74.498 94.437,74.117 94.437,73.914 94.717,73.635 94.717,73.127 94.894,72.949 94.894,2.362 94.793,2.261 94.793,2.007 94.742,1.956 94.742,1.778 94.615,1.651 94.615,1.448 94.59,1.422 94.59,1.372 94.412,1.194 94.412,1.041 94.107,0.737 94.082,0.737 94.082,0.711 93.65,0.279 93.599,0.279 93.421,0.102 93.345,0.102 93.193,-0.051 93.04,-0.051 92.913,-0.178 92.786,-0.178 92.71,-0.254 92.456,-0.254 92.354,-0.356 92.05,-0.356 91.999,-0.406 3.062,-0.406 3.012,-0.356 2.438,-0.356 2.311,-0.229 2.159,-0.229 2.032,-0.102 1.88,-0.102 1.676,0.102 1.524,0.102 1.295,0.33 1.295,0.356 1.27,0.356 0.635,0.991 0.635,1.168 0.432,1.372 0.432,1.6 0.229,1.803 0.229,2.235 0.127,2.337 0.127,3.327 0.178,3.378 0.178,73 0.305,73.127 0.305,73.457 0.533,73.685 0.533,73.939 0.813,74.219 0.813,74.32 1.27,74.778 1.295,74.778 1.626,75.108 1.778,75.108 1.956,75.286 2.134,75.286 2.261,75.413 2.464,75.413 2.565,75.514 2.931,75.514 3.007,75.59 91.405,75.59 91.44,75.555 92.288,75.555 92.456,75.387 92.735,75.387
no net on Top Layer "Top Layer-No Net" (solid, remove dead copper, shelved, pour order 2): 2.78,-0.497 cw(c3.367,2.819) 0.015,3.136 cw(c0.141,3.124) 0.05,3.213 0.05,72.862 cw(c0.178,72.862) 0.096,72.959 cw(c3.404,72.329) 2.897,75.658 cw(c2.972,75.555) 2.972,75.682 3.095,75.682 cw(c3.404,72.329) 3.712,75.682 91.973,75.682 cw(c91.973,75.555) 91.993,75.681 cw(c91.669,72.329) 95.036,72.329 cw(c91.669,72.329) 95.022,72.018 95.022,2.515 cw(c94.894,2.515) 95.016,2.476 cw(c91.669,2.845) 91.431,-0.514 cw(c91.364,-0.406) 91.364,-0.534 2.87,-0.534 cw(c2.87,-0.406)
no net on Bottom Layer "AutoNaming" (hatched 90Degree grid 0.508 track 0.203, remove dead copper, pour order 5): 91.669,75.555 92.187,75.555 92.304,75.438 92.354,75.489 92.634,75.489 92.812,75.311 93.091,75.311 93.32,75.082 93.523,75.082 93.853,74.752 93.878,74.752 93.878,74.676 94.336,74.219 94.336,74.016 94.742,73.609 94.742,73.076 94.894,72.923 94.894,2.21 94.691,2.007 94.691,1.473 94.412,1.194 94.412,1.016 94.005,0.61 93.955,0.61 93.523,0.178 93.345,0.178 93.015,-0.152 92.735,-0.152 92.532,-0.356 91.973,-0.356 91.923,-0.406 91.262,-0.406 91.237,-0.381 2.896,-0.381 2.87,-0.406 2.743,-0.279 2.159,-0.279 1.88,0 1.651,0 1.245,0.406 1.194,0.406 1.194,0.432 0.686,0.94 0.686,1.194 0.229,1.651 0.229,2.388 0.102,2.515 0.141,2.554 0.141,6.39 0.178,6.426 0.127,6.477 0.127,72.811 0.381,73.065 0.381,73.711 0.838,74.168 0.838,74.397 0.889,74.397 1.626,75.133 2.083,75.133 2.505,75.555 3.317,75.555 3.327,75.565 3.337,75.555 92.288,75.555 92.354,75.489

## Keep-outs
Keep-Out Layer:
  circle w0.254: c5,3.5 r2.54
  circle w0.254: c90,4.851 r2.54
  circle w0.254: c5,70 r2.54
  circle w0.254: c90,70 r2.54
  lines w0.254: 0.141,3.124 ccw(c3.367,2.819) 3.062,-0.406 ; 0.178,2.896 0.178,72.862 ; 0.178,72.634 cw(c3.404,72.329) 3.708,75.555 ; 2.87,-0.406 91.364,-0.406 ; 2.972,75.555 91.973,75.555 cw(c91.669,72.329) 94.894,72.024 ; 91.364,-0.381 ccw(c91.669,2.845) 94.894,2.54 ; 94.894,2.515 94.894,72.431

## Silkscreen, mask and mechanical layers (free items; w line width, h text height)
Top Overlay:
  text "HFUT / XuPeng" at 81.534,0.203 h1